# Altium PCB Microneedle_Patch.PcbDoc
Units mm, origin at the board's own origin, x right, y up, seen from the top; angles counter-clockwise.
Board outline 30.8 x 93 mm, 2 copper layers (Top, Bottom), stack 0.137 mm thick; 33 components, 33 nets, 708 pads, 16 vias.
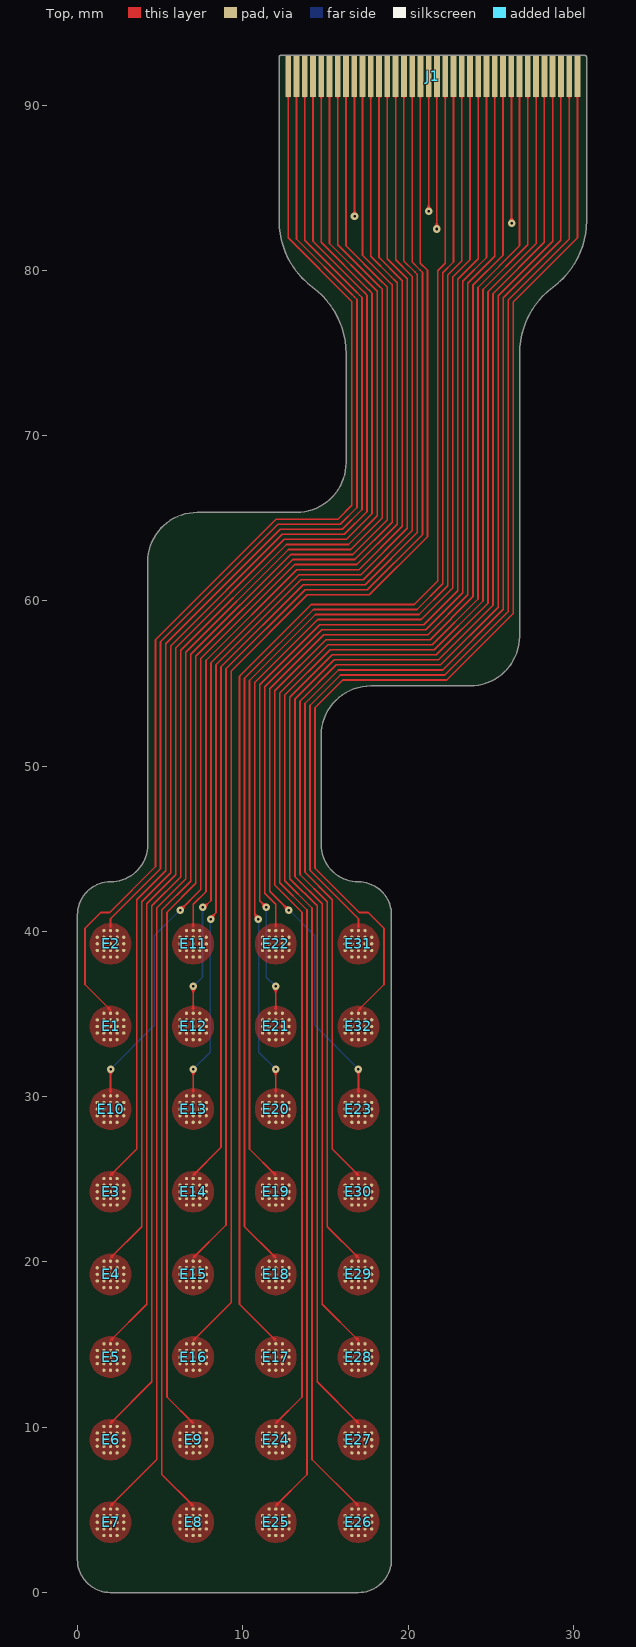
[diagram p0: Top view]
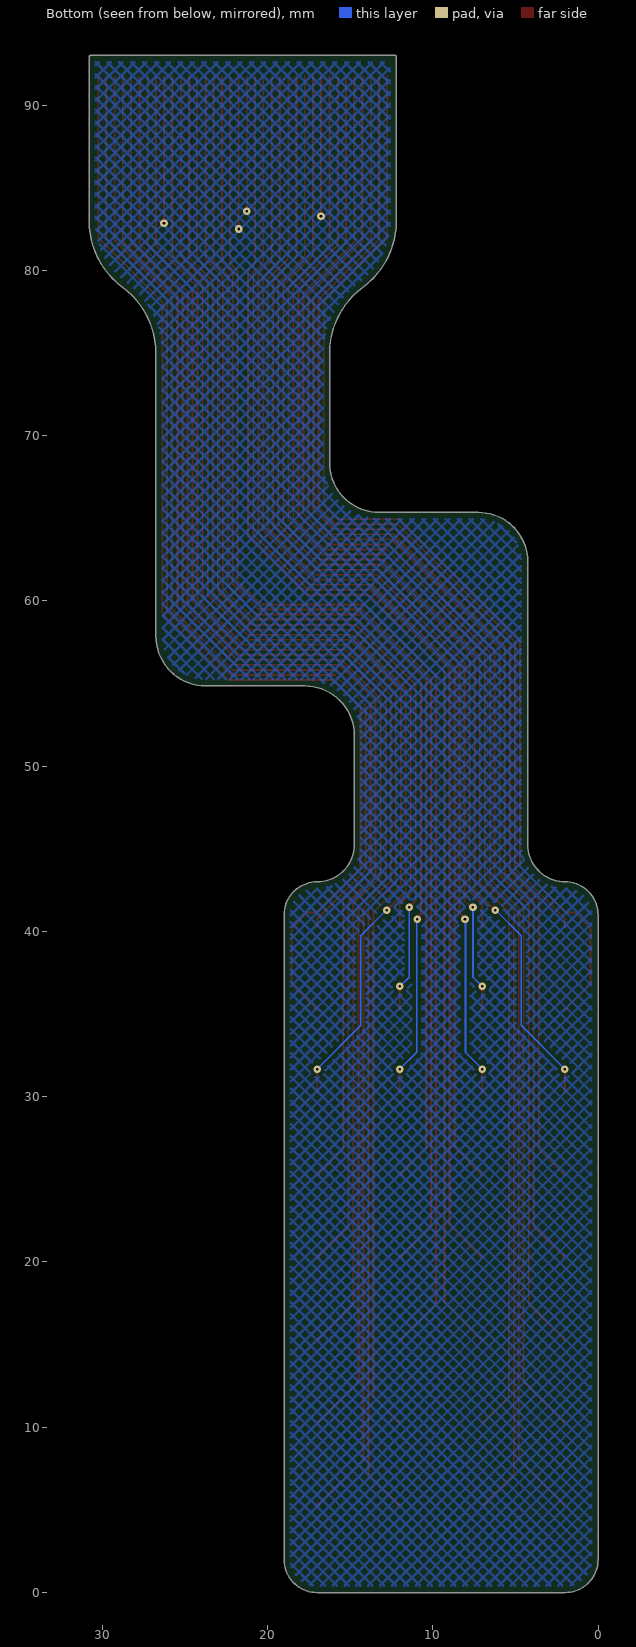
[diagram p1: Bottom view, seen from below]
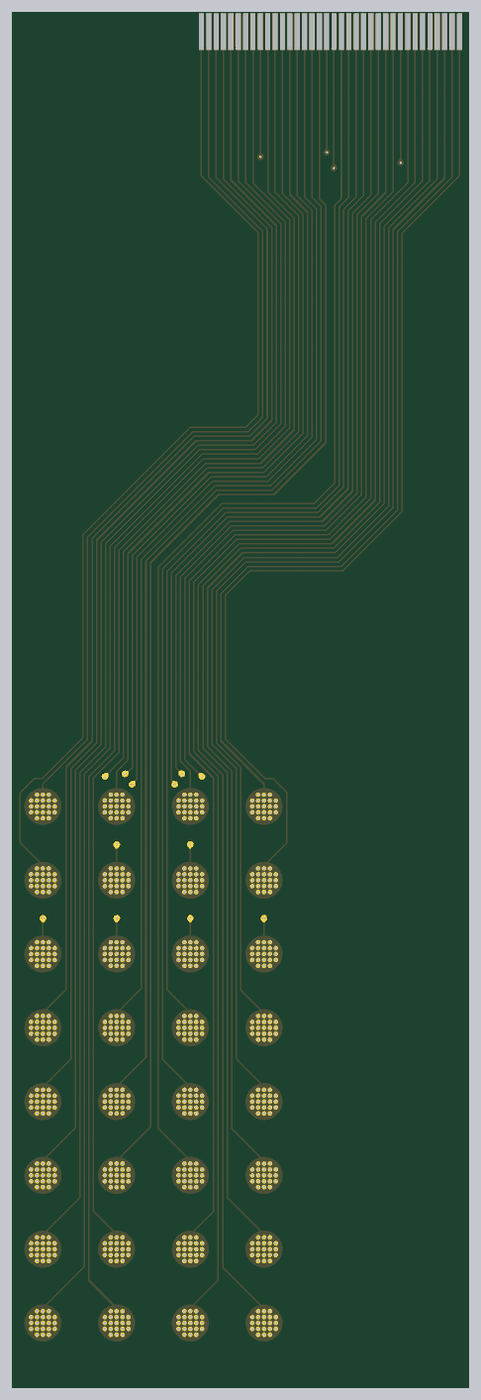
[diagram p2: 3D render of the assembled board from above, using the file's embedded part models]

## Layer stack, top to bottom
Board Layer Stack Top Coverlay: solder mask 0.025, Polymide, Dk 3.4
Adhesive 3: prepreg 0.025, Adhesive, Dk 3.3
Top: signal copper 0.018
Dielectric 1: core 0.013, Composite dielectric, Dk 3.3
Dielectric 3: core 0.025, Polymide, Dk 3.4
Dielectric 2: core 0.013, Composite dielectric, Dk 3.3
Bottom: signal copper 0.018
Adhesive 2: prepreg 0.025, Adhesive, Dk 3.3
Board Layer Stack Bottom Coverlay: solder mask 0.025, Polymide, Dk 3.4

## Board outline
2,0 cw(c2,2) 0,2 0,41 cw(c2,41) 2,43 ccw(c2,45.25) 4.25,45.25 4.25,62.356 cw(c7.25,62.356) 7.25,65.356 13.25,65.356 ccw(c13.25,68.356) 16.25,68.356 16.25,74.963 ccw(c11.25,74.963) 14.225,78.981 cw(c17.2,83) 12.2,83 12.2,92.9 cw(c12.3,92.9) 12.3,93 30.7,93 cw(c30.7,92.9) 30.8,92.9 30.8,83 cw(c25.8,83) 28.775,78.981 ccw(c31.75,74.963) 26.75,74.963 26.75,57.856 cw(c23.75,57.856) 23.75,54.856 17.75,54.856 ccw(c17.75,51.856) 14.75,51.856 14.75,45.25 ccw(c17,45.25) 17,43 cw(c17,41) 19,41 19,2 cw(c17,2) 17,0

## Design rules (kind name [scope] priority, off if disabled: settings)
BoardOutlineClearance ZIF_BoardEdge [InPadClass('ZIF_Pads')] p1: gap=0.305 ignorepadtopadclearanceinfootprint=FALSE except(0: SMDPad-OutlineEdge)
BoardOutlineClearance [All] p2: gap=0.305 ignorepadtopadclearanceinfootprint=FALSE
Clearance [All] p1: gap=0.203 ignorepadtopadclearanceinfootprint=TRUE except(0.127: Arc-SMDPad Track-SMDPad SMDPad-SMDPad)
ComponentClearance [All] p1: gap=0.102 collisioncheckmode=3 verticalgap=0.102 showdistances=FALSE
HoleSize [All] p1: absolutevalues=TRUE maxlimit=25.4 minlimit=0.102 maxpercent=80.000 minpercent=20.000
HoleToHoleClearance [All] p1: gap=0.254 allowstackedmicrovias=FALSE
MinimumSolderMaskSliver [All] p1: minsoldermaskwidth=0.102
PlaneClearance [All] p1: clearance=0.152
PlaneConnect [All] p1: pad.planeconnectstyle=Relief pad.reliefexpansion=0.508 pad.reliefentries=4 pad.reliefconductorwidth=0.254 pad.reliefairgap=0.254 via.planeconnectstyle=Direct via.reliefexpansion=0.508 via.reliefentries=4 via.reliefconductorwidth=0.254 via.reliefairgap=0.254
PolygonConnect [All] p1: thpad.connectstyle=Relief thpad.reliefconductorwidth=0.254 thpad.reliefentries=4 thpad.polygonreliefangle="90 Angle" thpad.airgapwidth=0.254 smdpad.connectstyle=Direct smdpad.reliefconductorwidth=0.254 smdpad.reliefentries=4 smdpad.polygonreliefangle="90 Angle" smdpad.airgapwidth=0.254 via.connectstyle=Direct via.reliefconductorwidth=0.254 via.reliefentries=4 via.polygonreliefangle="90 Angle" via.airgapwidth=0.254
RoutingVias [All] p1: holewidth=0.152 width=0.457 viastyle="Through Hole" minholewidth=0.152 minwidth=0.457 maxholewidth=0.152 maxwidth=0.457
SilkToSilkClearance [All] p1: silktosilkclearance=0.102
SilkToSolderMaskClearance [IsPad] p1: minsilkscreentomaskgap=0.051 clearancetoexposedcopper=FALSE
SolderMaskExpansion [All] p1: expansion=0.051 istentingtop=FALSE
SupplyNets "Schematic Supply Nets" [InNet('GND')] p1: voltage=0.000
Width [All] p1: maxlimit=0.102 minlimit=0.102 preferedwidth=0.102 minimp=50.000000 maximp=50.000000 favimp=50.000000
22 further rules are at their usual default settings.

## Classes and differential pairs
pad class ZIF_Pads: J1-1 J1-2 J1-3 J1-4 J1-5 J1-6 J1-7 J1-8 J1-9 J1-10 J1-11 J1-12 J1-13 J1-14 J1-15 J1-16 J1-17 J1-18 J1-19 J1-20 J1-21 J1-22 J1-23 J1-24 J1-25 J1-26 J1-27 J1-28 J1-29 J1-30 J1-31 J1-32 J1-33 J1-34 J1-35 J1-36
component class Main: E1 E2 E4 E6 E27

## Components (designator, comment, footprint, x,y, rotation, side; value= is the part's Value field where it differs from the comment)
E1 "2.5 mm" PCBComponent_1 2,34.25 r0 top
E2 "2.5 mm" PCBComponent_1 2,39.25 r0 top
E3 "2.5 mm" PCBComponent_1 2,24.25 r0 top
E4 "2.5 mm" PCBComponent_1 2,19.25 r0 top
E5 "2.5 mm" PCBComponent_1 2,14.25 r0 top
E6 "2.5 mm" PCBComponent_1 2,9.25 r0 top
E7 "2.5 mm" PCBComponent_1 2,4.25 r0 top
E8 "2.5 mm" PCBComponent_1 7,4.25 r0 top
E9 "2.5 mm" PCBComponent_1 7,9.25 r0 top
E10 "2.5 mm" PCBComponent_1 2,29.25 r0 top
E11 "2.5 mm" PCBComponent_1 7,39.25 r0 top
E12 "2.5 mm" PCBComponent_1 7,34.25 r0 top
E13 "2.5 mm" PCBComponent_1 7,29.25 r0 top
E14 "2.5 mm" PCBComponent_1 7,24.25 r0 top
E15 "2.5 mm" PCBComponent_1 7,19.25 r0 top
E16 "2.5 mm" PCBComponent_1 7,14.25 r0 top
E17 "2.5 mm" PCBComponent_1 12,14.25 r0 top
E18 "2.5 mm" PCBComponent_1 12,19.25 r0 top
E19 "2.5 mm" PCBComponent_1 12,24.25 r0 top
E20 "2.5 mm" PCBComponent_1 12,29.25 r0 top
E21 "2.5 mm" PCBComponent_1 12,34.25 r0 top
E22 "2.5 mm" PCBComponent_1 12,39.25 r0 top
E23 "2.5 mm" PCBComponent_1 17,29.25 r0 top
E24 "2.5 mm" PCBComponent_1 12,9.25 r0 top
E25 "2.5 mm" PCBComponent_1 12,4.25 r0 top
E26 "2.5 mm" PCBComponent_1 17,4.25 r0 top
E27 "2.5 mm" PCBComponent_1 17,9.25 r0 top
E28 "2.5 mm" PCBComponent_1 17,14.25 r0 top
E29 "2.5 mm" PCBComponent_1 17,19.25 r0 top
E30 "2.5 mm" PCBComponent_1 17,24.25 r0 top
E31 "2.5 mm" PCBComponent_1 17,39.25 r0 top
E32 "2.5 mm" PCBComponent_1 17,34.25 r0 top
J1 "XF2M-3615-1A" CONN_FPC_2X18_0MM5 21.5,91.75 r0 top

## Footprints (in the part's own frame and the unit in brackets; to place one, negate y for a bottom-side part, rotate by r counter-clockwise, add the part's x,y. Pads: shape width x height; smd on the part's side, far side on the other; paste and mask are expansions set on the pad)
CONN_FPC_2X18_0MM5 [mm] "Compatible with XF2M-3615-1A / 0.5 mm pitch, 2X18"
  rect 0.35x2.5 smd mask+0: 1(-8.75,0) 2(-8.25,0) 3(-7.75,0) 4(-7.25,0) 5(-6.75,0) 6(-6.25,0) 7(-5.75,0) 8(-5.25,0) 9(-4.75,0) 10(-4.25,0) 11(-3.75,0) 12(-3.25,0) 13(-2.75,0) 14(-2.25,0) 15(-1.75,0) 16(-1.25,0) 17(-0.75,0) 18(-0.25,0) 19(0.25,0) 20(0.75,0) 21(1.25,0) 22(1.75,0) 23(2.25,0) 24(2.75,0) 25(3.25,0) 26(3.75,0) 27(4.25,0) 28(4.75,0) 29(5.25,0) 30(5.75,0) 31(6.25,0) 32(6.75,0) 33(7.25,0) 34(7.75,0) 35(8.25,0) 36(8.75,0)
PCBComponent_1 [mm]
  round 0.2 smd paste+0 mask+0.05: 1(-0.8,-0.4) 1(-0.8,0) 1(-0.8,0.4) 1(-0.4,-0.8) 1(-0.4,-0.4) 1(-0.4,0) 1(-0.4,0.4) 1(-0.4,0.8) 1(0,-0.8) 1(0,-0.4) 1(0,0) 1(0,0.4) 1(0,0.8) 1(0.4,-0.8) 1(0.4,-0.4) 1(0.4,0) 1(0.4,0.4) 1(0.4,0.8) 1(0.8,-0.4) 1(0.8,0) 1(0.8,0.4)
  body extent -0.82,-0.82 0.82,0.82, height 0.4

## Part data
E1 E2 E3 E4 E5 E6 E7 E8 E9 E10 E11 E12 E13 E14 E15 E16 E17 E18 E19 E20 E21 E22 E23 E24 E25 E26 E27 E28 E29 E30 E31 E32: library part SENSE_UNEEDLE, "Microneedle electrode - 2.5 mm diameter"
J1: library part CONN_FPC_2X18_0MM5, "FPC Connector - FPC Side. 0.5 mm pitch / Compatible with XF2M-3615-1A", GRAMS Lib Spec=2.7

## Via types
v1: diameter 0.457, hole 0.152, Top to Bottom, 16 vias

## Nets (pads, with @x,y where several pads share a name; then routed paths per layer and width w, separated by ;. In a path a pad name is that pad's centre, name@x,y a point inside that pad or via, vN(x,y) a via of type N, cw(c..) or ccw(c..) an arc to the next point about the centre after c; other vN are vias at no path point)
GND: J1.9 J1.18 J1.19 J1.28 | length 34.8
  Top w0.102: J1.9 16.764,91.736 v1(16.764,83.261) ; v1(21.25,83.566) J1.18 ; v1(21.742,82.499) 21.742,91.742 J1.19 ; J1.28 26.264,91.736 v1(26.264,82.855)
Input1: E1.1 J1.1 | length 67.9
  Top w0.102: 2,35.25 0.457,36.793 0.457,40.196 1.408,41.147 1.947,41.147 4.725,43.925 4.725,57.652 12.012,64.94 15.769,64.94 16.606,65.776 16.606,78.109 12.75,81.964 J1.1
Input2: E2.1 J1.2 | length 61.4
  Top w0.102: 2,40.25 2,40.769 5.03,43.799 5.03,57.128 5.03,57.526 12.139,64.635 15.895,64.635 16.91,65.65 16.91,78.235 16.764,78.381 16.561,78.585 13.25,81.895 J1.2
Input3: E3.1 J1.3 | length 76.4
  Top w0.102: 2,25.25 3.586,26.836 3.586,41.924 5.334,43.672 5.334,57.002 5.334,57.399 12.265,64.33 16.021,64.33 17.215,65.524 17.215,78.361 17.069,78.508 16.866,78.711 13.75,81.827 J1.3
Input4: E4.1 J1.4 | length 81.5
  Top w0.102: 2,20.25 3.89,22.14 3.89,41.797 5.639,43.546 5.639,56.875 5.639,57.273 12.391,64.025 16.148,64.025 17.52,65.398 17.52,78.488 17.374,78.634 17.17,78.837 14.25,81.758 J1.4
Input5: E5.1 J1.5 | length 86.5
  Top w0.102: 2,15.25 4.195,17.445 4.195,41.671 5.944,43.42 5.944,56.749 5.944,57.147 12.517,63.72 16.274,63.72 17.825,65.271 17.825,78.614 17.678,78.76 17.475,78.963 14.75,81.689 J1.5
Input6: E6.1 J1.6 | length 91.6
  Top w0.102: 2,10.25 4.5,12.75 4.5,41.545 6.249,43.294 6.249,56.623 6.249,57.021 12.644,63.416 16.4,63.416 18.13,65.145 18.13,78.74 17.983,78.886 17.78,79.09 15.25,81.62 J1.6
Input7: E7.1 J1.7 | length 96.6
  Top w0.102: 2,5.25 4.805,8.055 4.805,41.418 6.554,43.167 6.554,56.497 6.554,56.894 12.77,63.111 16.526,63.111 18.434,65.019 18.434,78.866 18.288,79.013 18.085,79.216 15.75,81.551 J1.7
Input8: E8.1 J1.8 | length 96.2
  Top w0.102: 7,5.25 5.11,7.14 5.11,41.292 6.858,43.041 6.858,56.37 6.858,56.768 12.896,62.806 16.653,62.806 18.739,64.893 18.739,78.993 18.593,79.139 18.39,79.342 16.25,81.482 J1.8
Input9: E9.1 J1.10 | length 90.7
  Top w0.102: 7,10.25 5.414,11.836 5.414,41.166 7.163,42.915 7.163,56.244 7.163,56.642 13.022,62.501 16.779,62.501 19.044,64.766 19.044,79.119 18.898,79.265 18.694,79.468 17.25,80.913 J1.10
Input10: E10.1 J1.11 | length 71.6
  Top w0.102: 2,30.25 2,31.667 v1(2.007,31.674) ; v1(6.213,41.282) 7.468,42.537 7.468,56.118 7.468,56.516 13.149,62.196 16.905,62.196 19.349,64.64 19.349,79.245 19.202,79.391 18.999,79.595 17.75,80.844 J1.11
  Bottom w0.102: v1(2.007,31.674) 4.648,34.315 4.648,39.737 6.203,41.292 v1(6.213,41.282)
Input11: E11.1 J1.12 | length 59.5
  Top w0.102: 7,40.25 7,41.638 7.773,42.411 7.773,55.992 7.773,56.389 13.275,61.892 17.031,61.892 19.654,64.514 19.654,79.371 19.507,79.518 18.25,80.775 J1.12
Input12: E12.1 J1.13 | length 64.6
  Top w0.102: 7,35.25 7,36.667 v1(7.007,36.674) ; v1(7.569,41.453) 7.661,41.453 8.078,41.87 8.078,55.865 8.078,56.263 13.401,61.587 17.158,61.587 19.958,64.388 19.958,79.498 19.812,79.644 18.75,80.706 J1.13
  Bottom w0.102: v1(7.007,36.674) 7.569,37.236 v1(7.569,41.453)
Input13: E13.1 J1.14 | length 69.6
  Top w0.102: 7,30.25 7,31.667 v1(7.007,31.674) ; v1(8.052,40.742) 8.052,40.798 8.382,41.128 8.382,55.739 8.382,56.137 13.527,61.282 17.284,61.282 20.263,64.261 20.263,79.624 20.117,79.77 19.25,80.637 J1.14
  Bottom w0.102: v1(7.007,31.674) 8.026,32.694 8.026,40.716 v1(8.052,40.742)
Input14: E14.1 J1.15 | length 74.7
  Top w0.102: 7,25.25 8.687,26.937 8.687,55.613 8.687,56.011 13.654,60.977 17.41,60.977 20.568,64.135 20.568,79.75 20.422,79.896 19.75,80.568 J1.15
Input15: E15.1 J1.16 | length 79.7
  Top w0.102: 7,20.25 8.992,22.242 8.992,55.487 8.992,55.884 13.78,60.672 17.536,60.672 20.873,64.009 20.873,79.876 20.726,80.023 20.25,80.499 J1.16
Input16: E16.1 J1.17 | length 84.8
  Top w0.102: 7,15.25 9.297,17.547 9.297,55.758 13.906,60.368 17.663,60.368 21.178,63.883 21.178,80.003 20.75,80.43 J1.17
Input17: E17.1 J1.20 | length 86.2
  Top w0.102: 12,15.25 9.804,17.446 9.804,55.006 9.804,55.437 14.151,59.784 14.582,59.784 20.373,59.784 21.793,61.204 21.793,79.973 22.25,80.43 J1.20
Input18: E18.1 J1.21 | length 81.2
  Top w0.102: 12,20.25 10.109,22.141 10.109,54.88 10.109,55.311 14.278,59.479 14.709,59.479 20.542,59.479 22.098,61.035 22.098,62.752 22.098,63.183 22.098,63.941 22.098,79.847 22.75,80.499 J1.21
Input19: E19.1 J1.22 | length 76.1
  Top w0.102: 12,25.25 10.414,26.836 10.414,54.753 10.414,55.184 14.404,59.174 14.835,59.174 20.668,59.174 22.403,60.909 22.403,62.626 22.403,63.057 22.403,63.815 22.403,79.721 23.25,80.568 J1.22
Input20: E20.1 J1.23 | length 71.1
  Top w0.102: v1(10.948,40.742) 10.948,40.822 10.719,41.051 10.719,54.627 10.719,55.058 14.53,58.87 14.961,58.87 20.794,58.87 22.708,60.783 22.708,62.5 22.708,62.931 22.708,63.688 22.708,79.595 23.75,80.637 J1.23 ; 12,30.25 v1@12,31.667
  Bottom w0.102: v1(10.948,40.742) 10.974,40.716 10.974,32.694 v1(11.993,31.674)
Input21: E21.1 J1.24 | length 66.1
  Top w0.102: v1(11.431,41.453) 11.024,41.86 11.024,54.501 11.024,54.932 14.656,58.565 15.087,58.565 20.957,58.565 23.012,60.62 23.012,62.805 23.012,63.562 23.012,79.468 24.25,80.706 J1.24 ; 12,35.25 v1@12,36.667
  Bottom w0.102: v1(11.431,41.453) 11.431,37.236 v1(11.993,36.674)
Input22: E22.1 J1.25 | length 61
  Top w0.102: 12,40.25 12,41.638 11.328,42.31 11.328,54.375 11.328,54.806 14.783,58.26 15.214,58.26 21.083,58.26 23.317,60.494 23.317,62.247 23.317,62.678 23.317,63.436 23.317,79.342 24.75,80.775 J1.25
Input23: E23.1 J1.26 | length 73.1
  Top w0.102: v1(12.787,41.282) 11.633,42.436 11.633,54.248 11.633,54.679 14.909,57.955 15.34,57.955 21.21,57.955 23.622,60.368 23.622,62.121 23.622,62.552 23.622,63.31 23.622,79.216 25.25,80.844 J1.26 ; 17,30.25 v1@17,31.667
  Bottom w0.102: v1(12.787,41.282) 12.797,41.292 14.352,39.737 14.352,34.315 v1(16.993,31.674)
Input24: E24.1 J1.27 | length 92.3
  Top w0.102: 12,10.25 13.586,11.836 13.586,41.166 11.938,42.814 11.938,54.122 11.938,54.553 15.035,57.65 15.466,57.65 21.336,57.65 23.927,60.241 23.927,61.995 23.927,62.426 23.927,63.183 23.927,79.09 25.75,80.913 J1.27
Input25: E25.1 J1.29 | length 97.7
  Top w0.102: 12,5.25 13.89,7.14 13.89,41.292 12.243,42.94 12.243,53.996 12.243,54.427 15.161,57.346 15.592,57.346 21.462,57.346 24.232,60.115 24.232,62.3 24.232,63.057 24.232,78.963 26.75,81.482 J1.29
Input26: E26.1 J1.30 | length 98.1
  Top w0.102: 17,5.25 14.195,8.055 14.195,41.418 12.548,43.066 12.548,53.87 12.548,54.301 15.288,57.041 15.719,57.041 21.588,57.041 24.536,59.989 24.536,61.443 24.536,61.742 24.536,62.173 24.536,62.931 24.536,78.837 27.25,81.551 J1.30
Input27: E27.1 J1.31 | length 93.1
  Top w0.102: 17,10.25 14.5,12.75 14.5,41.545 12.852,43.192 12.852,53.743 12.852,54.174 15.414,56.736 15.845,56.736 21.715,56.736 24.841,59.863 24.841,61.317 24.841,61.616 24.841,62.047 24.841,62.805 24.841,78.711 27.75,81.62 J1.31
Input28: E28.1 J1.32 | length 88
  Top w0.102: 17,15.25 14.805,17.445 14.805,41.671 13.157,43.319 13.157,53.617 13.157,54.048 15.54,56.431 15.971,56.431 21.841,56.431 25.146,59.736 25.146,78.585 28.25,81.689 J1.32
Input29: E29.1 J1.33 | length 83
  Top w0.102: 17,20.25 15.11,22.14 15.11,41.797 13.462,43.445 13.462,53.491 13.462,53.922 15.666,56.126 16.097,56.126 21.967,56.126 25.451,59.61 25.451,61.065 25.451,78.458 28.75,81.758 J1.33
Input30: E30.1 J1.34 | length 77.9
  Top w0.102: 17,25.25 15.414,26.836 15.414,41.924 13.767,43.571 13.767,53.365 13.767,53.796 15.793,55.822 16.224,55.822 22.093,55.822 25.756,59.484 25.756,60.938 25.756,78.332 29.25,81.827 J1.34
Input31: E31.1 J1.35 | length 62.9
  Top w0.102: 17,40.25 17,40.769 14.072,43.697 14.072,53.238 14.072,53.669 15.919,55.517 16.35,55.517 22.22,55.517 26.06,59.358 26.06,60.812 26.06,78.206 29.75,81.895 J1.35
Input32: E32.1 J1.36 | length 69.4
  Top w0.102: 17,35.25 18.543,36.793 18.543,40.196 17.592,41.147 17.053,41.147 14.376,43.824 14.376,53.543 16.045,55.212 22.346,55.212 26.365,59.231 26.365,78.08 30.25,81.964 J1.36

## Polygon pours and split planes (outlines as drawn)
Input31 on Top "Electrode31" (solid, pour order 5): 17,40.5 cw(c17,39.25) 18.25,39.25 cw(c17,39.25) 17,38 cw(c17,39.25) 15.75,39.25 cw(c17,39.25)
Input18 on Top "Electrode18" (solid, pour order 27): 12,20.5 cw(c12,19.25) 13.25,19.25 cw(c12,19.25) 12,18 cw(c12,19.25) 10.75,19.25 cw(c12,19.25)
Input26 on Top "Electrode26" (solid, pour order 28): 17,5.5 cw(c17,4.25) 18.25,4.25 cw(c17,4.25) 17,3 cw(c17,4.25) 15.75,4.25 cw(c17,4.25)
Input32 on Top "Electrode32" (solid, pour order 0): 17,35.5 cw(c17,34.25) 18.25,34.25 cw(c17,34.25) 17,33 cw(c17,34.25) 15.75,34.25 cw(c17,34.25)
Input16 on Top "Electrode16" (solid, pour order 31): 7,15.5 cw(c7,14.25) 8.25,14.25 cw(c7,14.25) 7,13 cw(c7,14.25) 5.75,14.25 cw(c7,14.25)
Input14 on Top "Electrode14" (solid, pour order 23): 7,25.5 cw(c7,24.25) 8.25,24.25 cw(c7,24.25) 7,23 cw(c7,24.25) 5.75,24.25 cw(c7,24.25)
Input25 on Top "Electrode25" (solid, pour order 29): 12,5.5 cw(c12,4.25) 13.25,4.25 cw(c12,4.25) 12,3 cw(c12,4.25) 10.75,4.25 cw(c12,4.25)
Input1 on Top "Electrode1" (solid, pour order 4): 2,35.5 cw(c2,34.25) 3.25,34.25 cw(c2,34.25) 2,33 cw(c2,34.25) 0.75,34.25 cw(c2,34.25)
Input19 on Top "Electrode19" (solid, pour order 22): 12,25.5 cw(c12,24.25) 13.25,24.25 cw(c12,24.25) 12,23 cw(c12,24.25) 10.75,24.25 cw(c12,24.25)
Input12 on Top "Electrode12" (solid, pour order 15): 7,35.5 cw(c7,34.25) 8.25,34.25 cw(c7,34.25) 7,33 cw(c7,34.25) 5.75,34.25 cw(c7,34.25)
Input11 on Top "Electrode11" (solid, pour order 10): 7,40.5 cw(c7,39.25) 8.25,39.25 cw(c7,39.25) 7,38 cw(c7,39.25) 5.75,39.25 cw(c7,39.25)
Input9 on Top "Electrode9" (solid, pour order 3): 7,10.5 cw(c7,9.25) 8.25,9.25 cw(c7,9.25) 7,8 cw(c7,9.25) 5.75,9.25 cw(c7,9.25)
Input3 on Top "Electrode3" (solid, pour order 9): 2,25.5 cw(c2,24.25) 3.25,24.25 cw(c2,24.25) 2,23 cw(c2,24.25) 0.75,24.25 cw(c2,24.25)
Input4 on Top "Electrode4" (solid, pour order 16): 2,20.5 cw(c2,19.25) 3.25,19.25 cw(c2,19.25) 2,18 cw(c2,19.25) 0.75,19.25 cw(c2,19.25)
Input5 on Top "Electrode5" (solid, pour order 17): 2,15.5 cw(c2,14.25) 3.25,14.25 cw(c2,14.25) 2,13 cw(c2,14.25) 0.75,14.25 cw(c2,14.25)
Input6 on Top "Electrode6" (solid, pour order 24): 2,10.5 cw(c2,9.25) 3.25,9.25 cw(c2,9.25) 2,8 cw(c2,9.25) 0.75,9.25 cw(c2,9.25)
Input7 on Top "Electrode7" (solid, pour order 25): 2,5.5 cw(c2,4.25) 3.25,4.25 cw(c2,4.25) 2,3 cw(c2,4.25) 0.75,4.25 cw(c2,4.25)
Input8 on Top "Electrode8" (solid, pour order 32): 7,5.5 cw(c7,4.25) 8.25,4.25 cw(c7,4.25) 7,3 cw(c7,4.25) 5.75,4.25 cw(c7,4.25)
Input15 on Top "Electrode15" (solid, pour order 26): 7,20.5 cw(c7,19.25) 8.25,19.25 cw(c7,19.25) 7,18 cw(c7,19.25) 5.75,19.25 cw(c7,19.25)
Input2 on Top "Electrode2" (solid, pour order 8): 2,40.5 cw(c2,39.25) 3.25,39.25 cw(c2,39.25) 2,38 cw(c2,39.25) 0.75,39.25 cw(c2,39.25)
Input20 on Top "Electrode20" (solid, pour order 14): 12,30.5 cw(c12,29.25) 13.25,29.25 cw(c12,29.25) 12,28 cw(c12,29.25) 10.75,29.25 cw(c12,29.25)
Input21 on Top "Electrode21" (solid, pour order 19): 12,35.5 cw(c12,34.25) 13.25,34.25 cw(c12,34.25) 12,33 cw(c12,34.25) 10.75,34.25 cw(c12,34.25)
Input22 on Top "Electrode22" (solid, pour order 11): 12,40.5 cw(c12,39.25) 13.25,39.25 cw(c12,39.25) 12,38 cw(c12,39.25) 10.75,39.25 cw(c12,39.25)
Input23 on Top "Electrode23" (solid, pour order 6): 17,30.5 cw(c17,29.25) 18.25,29.25 cw(c17,29.25) 17,28 cw(c17,29.25) 15.75,29.25 cw(c17,29.25)
Input13 on Top "Electrode13" (solid, pour order 18): 7,30.5 cw(c7,29.25) 8.25,29.25 cw(c7,29.25) 7,28 cw(c7,29.25) 5.75,29.25 cw(c7,29.25)
Input10 on Top "Electrode10" (solid, pour order 7): 2,30.5 cw(c2,29.25) 3.25,29.25 cw(c2,29.25) 2,28 cw(c2,29.25) 0.75,29.25 cw(c2,29.25)
Input29 on Top "Electrode29" (solid, pour order 13): 17,20.5 cw(c17,19.25) 18.25,19.25 cw(c17,19.25) 17,18 cw(c17,19.25) 15.75,19.25 cw(c17,19.25)
Input30 on Top "Electrode30" (solid, pour order 12): 17,25.5 cw(c17,24.25) 18.25,24.25 cw(c17,24.25) 17,23 cw(c17,24.25) 15.75,24.25 cw(c17,24.25)
Input24 on Top "Electrode24" (solid, pour order 2): 12,10.5 cw(c12,9.25) 13.25,9.25 cw(c12,9.25) 12,8 cw(c12,9.25) 10.75,9.25 cw(c12,9.25)
Input28 on Top "Electrode28" (solid, pour order 20): 17,15.5 cw(c17,14.25) 18.25,14.25 cw(c17,14.25) 17,13 cw(c17,14.25) 15.75,14.25 cw(c17,14.25)
Input27 on Top "Electrode27" (solid, pour order 21): 17,10.5 cw(c17,9.25) 18.25,9.25 cw(c17,9.25) 17,8 cw(c17,9.25) 15.75,9.25 cw(c17,9.25)
Input17 on Top "Electrode17" (solid, pour order 30): 12,15.5 cw(c12,14.25) 13.25,14.25 cw(c12,14.25) 12,13 cw(c12,14.25) 10.75,14.25 cw(c12,14.25)
no net on Layer0 "Default Coverlay 1 Top" (split plane): 176 vertices, not listed, extent 0,0 30.8,93
no net on Layer0 "Default Coverlay 1 Bottom" (split plane): 176 vertices, not listed, extent 0,0 30.8,93
GND on Bottom "GND_BOT" (hatched 45Degree grid 0.508 track 0.152, remove dead copper, pour order 33): 11.582,93.777 31.344,93.777 31.344,80.01 27.686,76.352 27.686,57.201 25.197,54.712 16.764,54.712 14.783,52.73 14.783,44.298 15.748,43.332 17.932,43.332 18.898,42.367 18.898,1.27 17.678,0.051 -0.102,0.051 -0.102,9.398 0.102,9.601 0.102,42.316 4.318,46.533 4.318,64.11 5.639,65.43 12.649,65.43 15.748,68.529 15.748,75.895 11.582,80.061

## Silkscreen, mask and mechanical layers (free items; w line width, h text height)
Board Outline:
  circle w0.2: c9.5,0 r0.05
  lines w0.2: 0,2 ccw(c2,2) 2,0 17,0 ccw(c17,2) 19,2 19,41 ccw(c17,41) 17,43 cw(c17,45.25) 14.75,45.25 14.75,51.856 cw(c17.75,51.856) 17.75,54.856 23.75,54.856 ccw(c23.75,57.856) 26.75,57.856 26.75,74.963 cw(c31.75,74.963) 28.775,78.981 ccw(c25.8,83) 30.8,83 30.8,92.9 ccw(c30.7,92.9) 30.7,93 12.3,93 ccw(c12.3,92.9) 12.2,92.9 12.2,83 ccw(c17.2,83) 14.225,78.981 cw(c11.25,74.963) 16.25,74.963 16.25,68.356 cw(c13.25,68.356) 13.25,65.356 7.25,65.356 ccw(c7.25,62.356) 4.25,62.356 4.25,45.25 cw(c2,45.25) 2,43 ccw(c2,41) 0,41 0,2
Manufacturing Notes:
  lines w0.2: 12.2,88.5 30.8,88.5 30.8,93 12.2,93 12.2,88.5
  lines w0.254: 78.486,52.07 145.796,52.07 145.796,55.88 78.486,55.88 78.486,59.69 145.796,59.69 145.796,63.5 78.486,63.5 78.486,67.31 145.796,67.31 145.796,71.12 78.486,71.12 78.486,74.93 145.796,74.93 145.796,78.74 78.486,78.74 78.486,82.55 145.796,82.55 145.796,83.82 ; 138.176,48.26 138.176,90.17 ; 138.176,93.98 138.176,90.17 ; 145.796,86.36 78.486,86.36 78.486,90.17 ; 78.486,90.17 92.456,90.17 ; 78.486,90.17 78.486,93.98 145.796,93.98 145.796,90.17 ; 78.486,90.17 78.486,48.26 145.796,48.26 145.796,90.17 ; 78.486,90.17 145.796,90.17 ; 92.456,90.17 92.456,93.98 105.156,93.98 105.156,90.17 ; 92.456,90.17 92.456,48.26 105.156,48.26 105.156,90.17 ; 105.156,90.17 115.316,90.17 ; 105.156,90.17 115.316,90.17 ; 115.316,90.17 115.316,93.98 129.286,93.98 129.286,90.17 ; 115.316,90.17 115.316,48.26 129.286,48.26 129.286,90.17 ; 129.286,90.17 138.176,90.17 ; 129.286,90.17 138.176,90.17 ; 138.176,90.17 145.796,90.17
  text "Bottom-side Polymide stiffener under ZIF tail." at 32.96,92.065 h1.52
  text "Type" at 82.55,91.726 h1.52
  text "Material" at 96.012,91.726 h1.52
  text "Weight" at 108.204,91.726 h1.52
  text "Dk" at 133.096,91.726 h1.52
  text "Thickness" at 118.872,91.694 h1.52
  text "Df" at 141.478,91.678 h1.52
  text "Polymide thickness: 0.088 mm" at 32.96,90.285 h1.52
  text "Adhesive thickness: 0.025 mm" at 32.96,88.238 h1.52
  text "Polymide" at 96.266,87.916 h1.52
  text "Top Coverlay" at 80.181,87.63 h1.52
  text "0.025 mm" at 119.126,87.647 h1.52
  text "3.4" at 133.096,87.63 h1.52
  text "0.015" at 140.716,87.647 h1.52
  text "Finished thickness in ZIF region: 0.30 mm." at 32.96,86.46 h1.52
  text "0.025 mm" at 119.126,83.837 h1.52
  text "Adhesive" at 80.181,83.549 h1.52
  text "Top Layer" at 80.181,80.01 h1.52
  text "0.018 mm" at 119.126,80.027 h1.52
  text "0.5 oz" at 107.696,79.741 h1.52
  text "0.013 mm" at 119.126,76.217 h1.52
  text "Adhesive" at 80.181,75.929 h1.52
  text "0.025 mm" at 119.126,72.407 h1.52
  text "3.4" at 133.096,72.407 h1.52
  text "0.015" at 140.716,72.39 h1.52
  text "Polymide" at 96.266,72.373 h1.52
  text "Core" at 80.181,72.121 h1.52
  text "0.013 mm" at 119.126,68.597 h1.52
  text "Adhesive" at 80.181,68.309 h1.52
  text "0.5 oz" at 108,64.9 h1.52
  text "Bottom Layer" at 80.181,64.77 h1.52
  text "0.018 mm" at 119.126,64.787 h1.52
  text "0.025 mm" at 119.126,60.977 h1.52
  text "Adhesive" at 80.181,60.689 h1.52
  text "Polymide" at 96.266,57.419 h1.52
  text "Bottom Coverlay" at 80.181,57.15 h1.52
  text "0.025 mm" at 119.126,57.167 h1.52
  text "3.4" at 133.096,57.167 h1.52
  text "0.015" at 140.716,57.15 h1.52
  text "0.025 mm" at 119.126,53.643 h1.52
  text "Adhesive" at 80.181,53.356 h1.52
  text "0.088 mm" at 119.126,49.833 h1.52
  text "3.4" at 133.096,49.833 h1.52
  text "0.015" at 140.716,49.816 h1.52
  text "Polymide" at 96.266,49.799 h1.52
  text "Bottom Stiffener" at 80.181,49.547 h1.52
  text "Finished thickness (with stiffener): 0.30 mm nominal" at 78.46,45.511 h1.52
  text "Finished thickness (without stiffener): 0.187 mm nominal" at 78.56,43.811 h1.52
  text "Substrate Finish: ENEPIG" at 78.56,41.95 h1.52
  text "Thickness of Immersion Gold: 4U\"" at 78.5,40.129 h1.52
Board Shape:
  circle w0.2: c9.5,0 r0.05
  lines w0.2: 0,2 ccw(c2,2) 2,0 17,0 ccw(c17,2) 19,2 19,41 ccw(c17,41) 17,43 cw(c17,45.25) 14.75,45.25 14.75,51.856 cw(c17.75,51.856) 17.75,54.856 23.75,54.856 ccw(c23.75,57.856) 26.75,57.856 26.75,74.963 cw(c31.75,74.963) 28.775,78.981 ccw(c25.8,83) 30.8,83 30.8,92.9 ccw(c30.7,92.9) 30.7,93 12.3,93 ccw(c12.3,92.9) 12.2,92.9 12.2,83 ccw(c17.2,83) 14.225,78.981 cw(c11.25,74.963) 16.25,74.963 16.25,68.356 cw(c13.25,68.356) 13.25,65.356 7.25,65.356 ccw(c7.25,62.356) 4.25,62.356 4.25,45.25 cw(c2,45.25) 2,43 ccw(c2,41) 0,41 0,2
Stiffener:
  lines w0.2: 12.2,88.5 30.8,88.5 30.8,93 12.2,93 12.2,88.5
  text "Bottom-side Polymide stiffener under ZIF tail." at 32.96,92.065 h1.52
  text "Polymide thickness: 0.088 mm" at 32.96,90.285 h1.52
  text "Adhesive thickness: 0.025 mm" at 32.96,88.238 h1.52
  text "Finished thickness in ZIF region: 0.30 mm." at 32.96,86.46 h1.52